# EAGLE board PCB_CAPA1 (EAGLE 9.5.1)
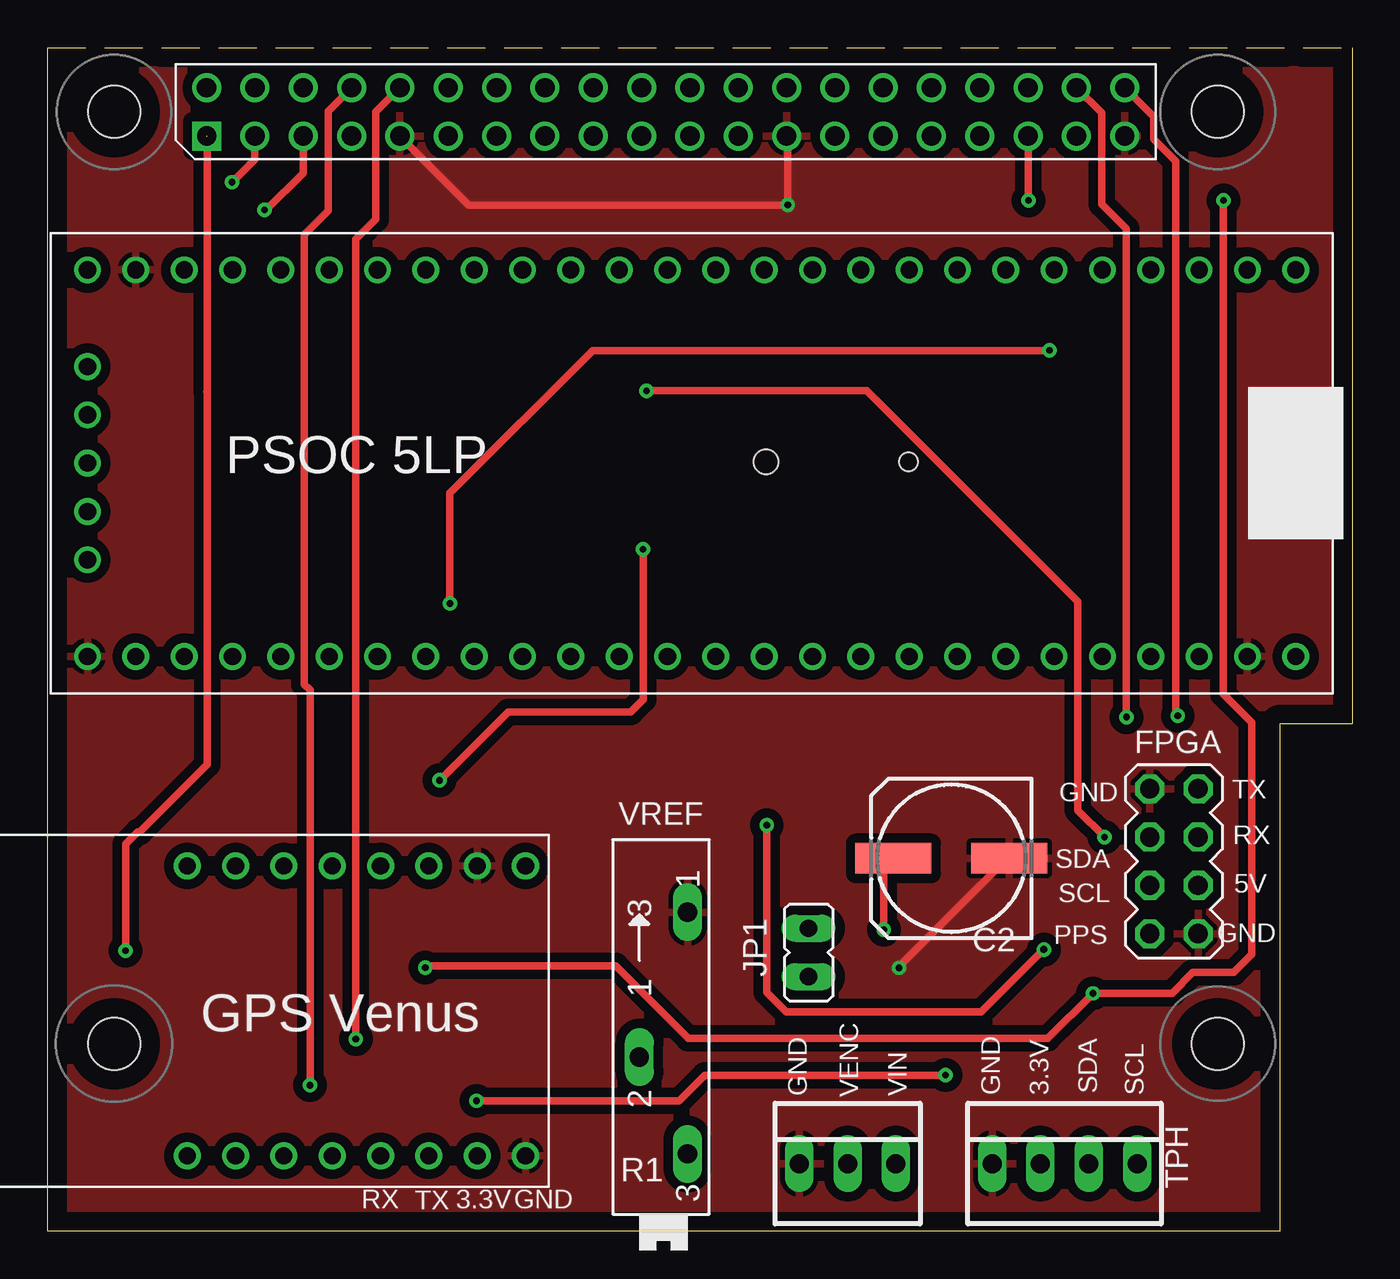
[diagram p0: board, top side]
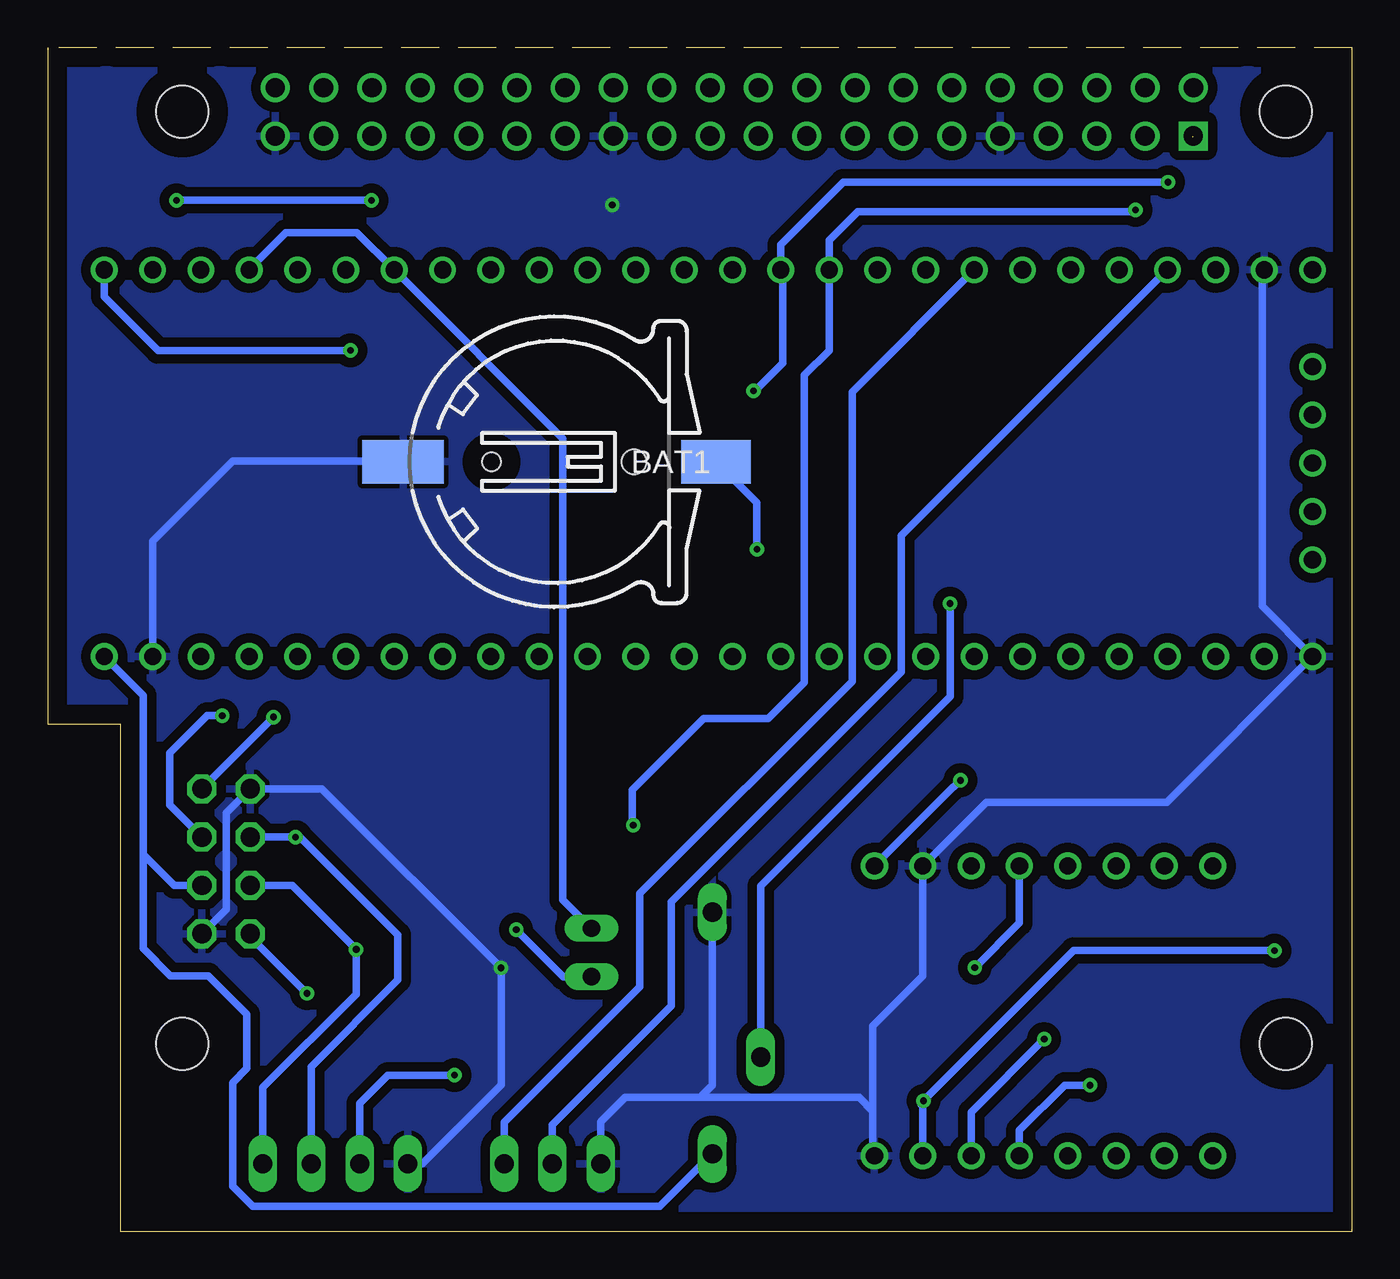
[diagram p1: board, bottom side, seen from below]

Size 68.58 x 62.23 mm. Coordinates in mm from the lower left corner, seen from the top.
Outline: 0,0 0,62.23 68.58,62.23 68.58,26.67 64.77,26.67 64.77,0 0,0
Copper layers (1*16): Top 0.035mm / dielectric 1.5mm / Bottom 0.035mm
Design rules "default": minimum track width 6mil, minimum drill 0.35mm, track to track 6mil, track to pad 6mil, pad to pad 6mil, via to via 6mil, smd to smd 6mil, copper to edge 40mil, drill to drill 6mil, minimum pad ring 10mil, minimum via ring 8mil, stop-mask expansion 4mil, vias tented up to drill 0mil, thermal gap 10mil

## Footprints (pad centres in the part's own frame; a part is rotated, then mirrored left to right if it is on the bottom)
CH291-1220LF = smd 2.3 x 3.66: + 0,-2.296 | smd 2.3 x 4.3: - 0,14.146 | hole 1.3: 0,2 | hole 1: 0,9.5
153CLV-0807 = smd 4 x 1.6: + 3.05,0; - -3.05,0
MA04-2 = drill 1.016 octagon: 1 -3.81,-1.27; 2 -3.81,1.27; 3 -1.27,-1.27; 4 -1.27,1.27; 5 1.27,-1.27; 6 1.27,1.27; 7 3.81,-1.27; 8 3.81,1.27
GPS_VENUS = drill 0.9 pad 1.422: 3.3V 0,-15.24; CLK 0,-5.08; CS 0,-7.62; GND 15.24,-15.24; GND1 0,-17.78; MISO 0,-2.54; MOSI 0,0; NAV 15.24,-12.7; PPS 15.24,-10.16; RX0 0,-10.16; RX1 15.24,-7.62; SCL 15.24,-2.54; SDA 15.24,0; TX0 0,-12.7; TX1 15.24,-5.08; VBAT 15.24,-17.78
JP1 = drill 0.914 long: 1 0,-1.27; 2 0,1.27
RPI3 = drill 1.016 square: P$1 8.37,51.23 | drill 1.016: P$2 8.357,53.772; P$3 10.897,51.232; P$4 10.897,53.772; P$5 13.437,51.232; P$6 13.437,53.772; P$7 15.977,51.232; P$8 15.977,53.772; P$9 18.517,51.232; P$10 18.517,53.772; P$11 21.057,51.232; P$12 21.057,53.772; P$13 23.597,51.232; P$14 23.597,53.772; P$15 26.137,51.232; P$16 26.137,53.772; P$17 28.677,51.232; P$18 28.677,53.772; P$19 31.217,51.232; P$20 31.217,53.772; P$21 33.757,51.232; P$22 33.757,53.772; P$23 36.297,51.232; P$24 36.297,53.772; P$25 38.837,51.232; P$26 38.837,53.772; P$27 41.377,51.232; P$28 41.377,53.772; P$29 43.917,51.232; P$30 43.917,53.772; P$31 46.457,51.232; P$32 46.457,53.772; P$33 48.997,51.232; P$34 48.997,53.772; P$35 51.537,51.232; P$36 51.537,53.772; P$37 54.077,51.232; P$38 54.077,53.772; P$39 56.617,51.232; P$40 56.617,53.772 | hole 2.75: 3.5,3.5; 61.5,3.5; 3.5,52.5; 61.5,52.5
SP19L = drill 1.016 long: A 5.715,-1.27; E -6.985,-1.27; S -1.905,1.27
PSOC_5LP = drill 0.9 pad 1.4: 0.0 0,-38.1; 0.1 0,-40.64; 0.2 0,-43.18; 0.3 0,-45.72; 0.4 0,-48.26; 0.5 0,-50.8; 0.6 0,-53.34; 0.7 0,-55.88; 1.0 20.32,-22.86; 1.1 20.32,-20.32; 1.2 20.32,-17.78; 1.3 20.32,-15.24; 1.4 20.32,-12.7; 1.5 20.32,-10.16; 1.6 20.32,-7.62; 1.7 20.32,-5.08; 2.0 20.32,-63.5; 2.1 20.32,-60.96; 2.2 20.32,-58.42; 2.3 20.32,-55.88; 2.4 20.32,-53.34; 2.5 20.32,-50.8; 2.6 20.32,-48.26; 2.7 20.32,-45.72; 3.0 0,-2.54; 3.1 0,-5.08; 3.2 0,-7.62; 3.3 0,-10.16; 3.4 0,-12.7; 3.5 0,-15.24; 3.6 0,-17.78; 3.7 0,-20.32; 12.2 20.32,-30.48; 12.3 20.32,-33.02; 12.4 20.32,-35.56; 12.5 20.32,-38.1; 12.6 20.32,-40.64; 12.7 20.32,-43.18; 15.0 0,-22.86; 15.1 0,-25.4; 15.2 0,-27.94; 15.3 0,-30.48; 15.4 0,-33.02; 15.5 0,-35.56; GND 0,0; GND2 0,-60.96; GND3 20.32,-2.54; GND4 7.62,0; RST 0,-58.42; RST2 10.16,0; SCL 20.32,-25.4; SDA 20.32,-27.94; SWDCLK 12.7,0; SWDI0 15.24,0; VDD 0,-63.5; VDD2 20.32,0; VTARG 5.08,0
22-23-2041 = drill 1 long: 1 -3.81,0; 2 -1.27,0; 3 1.27,0; 4 3.81,0
22-23-2031 = drill 1 long: 1 -2.54,0; 2 0,0; 3 2.54,0

## Placement (x,y rotation side)
BAT1  3V  [CH291-1220LF]  35.75,40.45 90 bottom
C2  [153CLV-0807]  47.5,19.6 180 top
FPGA  [MA04-2]  59.2,19.45 90 top
GPS  GPS_VENUS  [GPS_VENUS]  7.34,3.97 90 top
JP1  [JP1]  40,14.65 0 top
PCB1  RPI3RPI3  [RPI3]  0,6.35 0 top
R1  [SP19L]  32.37,11.05 90 top
U$1  PSOC_5LP  [PSOC_5LP]  2.1,30.22 90 top
X1  SENSOR TPH  [22-23-2041]  53.45,3.55 0 top
X2  EMILL  [22-23-2031]  42.05,3.55 0 top

## Library data of the parts
BAT1 = battery
C2 = rcl; SPICEPREFIX: C
FPGA = con-lstb_v2; OC_FARNELL: unknown; OC_NEWARK: unknown
GPS = GPS_VENUS
JP1 = jumper
PCB1 = RP3B
R1 = pot
U$1 = PSOC_5LP
X1 = con-molex; MF: MOLEX; MPN: 22-23-2041; OC_FARNELL: 1462920; OC_NEWARK: 38C0355
X2 = con-molex; MF: MOLEX; MPN: 22-23-2031; OC_FARNELL: 1462950; OC_NEWARK: 30C0862

## Nets
3.3V: GPS.3.3V PCB1.P$1 X1.2
5V: FPGA.3 R1.E U$1.VDD
GND: BAT1.- C2.- FPGA.1 FPGA.8 GPS.GND GPS.GND1 PCB1.P$9 PCB1.P$25 PCB1.P$39 R1.A U$1.GND U$1.GND2 U$1.GND3 X1.1 X2.1
N$1: BAT1.+ GPS.VBAT
N$2: C2.+ JP1.1
PPS: FPGA.2 GPS.PPS PCB1.P$35
RX2PI: FPGA.5 PCB1.P$40
RXPI: GPS.TX0 PCB1.P$10
SCL: FPGA.4 PCB1.P$5 U$1.SCL X1.4
SDA: FPGA.6 PCB1.P$3 U$1.SDA X1.3
TX2PI: FPGA.7 PCB1.P$38
TXPI: GPS.RX0 PCB1.P$8
VDC: JP1.2 U$1.2.3 U$1.2.6
VENC: U$1.1.6 X2.2
VIN: U$1.1.2 X2.3
VREF: R1.S U$1.2.0

## Tracks (layer width: path | path; a pad name or v marks a point on that pad's centre or on a via)
3.3V  (via drill 0.35)  (1 unrouted)
  Top 0.4: v22.55,6.85 33.2,6.85 34.55,8.2 v47.2,8.2 | 8.37,44.13 8.4,44.1 8.4,24.55 4.85,21 4.75,21 4.1,20.35 v4.1,14.75
  Top 0.406: 8.4,44.1 8.4,57.55
  Bottom 0.4: GPS.3.3V 22.58,6.58 22.65,6.65 22.65,6.75 v22.55,6.85 14.65,14.75 v4.1,14.75 | X1.2 52.18,6.72 50.7,8.2 v47.2,8.2
5V
  Bottom 0.4: FPGA.3 61.93,18.18 63.55,19.8 | 63.55,19.8 63.55,26.3 63.55,28.17 U$1.VDD | R1.E 36.41,1.3 57.8,1.3 58.85,2.35 58.85,7.8 58.1,8.55 58.1,11.4 60.12,13.43 62.12,13.43 63.55,14.85 63.55,19.8
GND  (via drill 0.35)
  Top 0.4: v38.9,53.95 38.84,54.01 | C2.- 50.2,19.35 44.74,13.89 v44.74,13.84
  Top 0.406: 38.9,57.52 v38.9,53.95 22.15,53.95 PCB1.P$9
  Bottom 0.4: X1.1 48.89,3.55 44.74,7.7 v44.74,13.84 54.16,23.26 FPGA.8 59.2,21.99 59.2,16.91 FPGA.1 | R1.A 33.64,7.66 34.27,7.03 | v38.9,53.95 38.95,53.9 | U$1.GND3 4.75,50.65 4.75,32.87 U$1.GND 9.77,22.55 19.24,22.55 GPS.GND 22.58,13.42 25.2,10.8 25.2,6.3 | 25.2,6.3 25.2,4.05 GPS.GND1 | 25.2,6.3 25.93,7.03 34.27,7.03 | 34.27,7.03 38.23,7.03 39.51,5.74 X2.1 | U$1.GND2 63.06,36.29 58.85,40.5 49.95,40.5 BAT1.-
  pour Top (isolate 0.5): 0.05,62.25 68.5,62.25 68.5,26.75 68.55,26.7 64.9,26.7 64.85,26.75 64.85,0 0,0 0,62.2
  pour Bottom (isolate 0.5): 0,62.25 68.5,62.25 68.55,62.2 68.55,26.65 64.8,26.65 64.8,-0.05 64.85,-0.1 0,-0.1
N$1  (via drill 0.35)
  Top 0.4: v20.6,23.7 24.2,27.3 30.65,27.3 31.3,27.95 v31.3,35.85
  Bottom 0.4: GPS.VBAT 20.98,23.35 20.95,23.35 v20.6,23.7 | v31.3,35.85 31.3,38.3 BAT1.+
N$2  (via drill 0.35)
  Top 0.4: v43.95,15.85 43.95,18.9 44.65,19.6 C2.+
  Bottom 0.4: JP1.1 41.48,13.38 v43.95,15.85
PPS  (via drill 0.35)
  Top 0.4: v19.85,13.85 19.95,13.95 29.85,13.95 33.67,10.12 52.58,10.12 v54.95,12.5 59.1,12.5 60.2,13.6 62.35,13.6 63.3,14.55 63.3,26.75 61.8,28.25 v61.8,54.2 | PCB1.P$35 51.55,57.57 v51.55,54.2
  Bottom 0.4: FPGA.2 57.93,15.48 v54.95,12.5 | v19.85,13.85 17.5,16.2 GPS.PPS | v61.8,54.2 v51.55,54.2
RX2PI  (via drill 0.35)
  Top 0.4: v59.4,27.1 59.35,27.05 59.3,27.1 59.3,56.25 58.15,57.4 58.15,58.59 PCB1.P$40
  Bottom 0.4: v59.4,27.1 60.2,27.1 62.15,25.15 62.15,22.4 FPGA.5
RXPI  (via drill 0.35)
  Top 0.4: 17.25,58.85 17.25,53.2 16.2,52.15 v16.2,10.1
  Top 0.406: 17.25,58.85 PCB1.P$10
  Bottom 0.4: v16.2,10.1 20.04,6.26 GPS.TX0
SCL  (via drill 0.35)
  Top 0.4: v11.4,53.7 11.5,53.7 13.44,55.64 | v37.8,21.35 37.8,12.55 38.83,11.53 49.08,11.53 v52.36,14.81 52.4,14.85
  Top 0.406: 13.44,55.64 PCB1.P$5
  Bottom 0.4: X1.4 57.26,7.56 52.36,12.46 v52.36,14.81 55.73,18.18 FPGA.4 | v11.4,53.7 11.5,53.6 26,53.6 27.5,52.1 U$1.SCL 27.5,46.3 28.8,45 28.8,28.85 30.7,26.95 34.1,26.95 37.85,23.2 37.85,21.4 v37.8,21.35
SDA  (via drill 0.35)
  Top 0.4: v9.7,55.15 10.9,56.35 | v55.55,20.72 54.15,22.12 54.15,33.1 43.05,44.2 31.45,44.2 v31.48,44.17
  Top 0.406: 10.9,56.35 PCB1.P$3
  Bottom 0.4: X1.3 54.72,8.65 50.17,13.2 50.17,15.57 55.32,20.72 v55.55,20.72 FPGA.6 | v9.7,55.15 26.75,55.15 30.04,51.86 U$1.SDA 29.95,50.45 29.95,45.65 31.45,44.15 v31.48,44.17
TX2PI  (via drill 0.35)
  Top 0.4: 55.4,58.8 55.4,54 56.7,52.7 v56.7,27.03
  Top 0.406: 55.4,58.8 PCB1.P$38
  Bottom 0.4: v56.7,27.03 FPGA.7
TXPI  (via drill 0.35)
  Top 0.4: 14.75,58.9 14.75,53.65 13.5,52.4 13.5,28.75 13.8,28.45 v13.8,7.67
  Top 0.406: 14.75,58.9 PCB1.P$8
  Bottom 0.4: v13.8,7.67 15.13,7.67 17.5,5.3 GPS.RX0
VDC
  Bottom 0.4: JP1.2 41.5,17.42 41.5,41.68 U$1.2.6 52.32,52.5 56.05,52.5 57.99,50.55 U$1.2.3
VENC
  Bottom 0.4: U$1.1.6 23.7,36.56 23.7,29.4 35.8,17.3 35.8,11.85 42.05,5.6 X2.2
VIN
  Bottom 0.4: U$1.1.2 26.3,44.12 26.3,28.9 37.45,17.75 37.45,12.85 44.59,5.71 X2.3
VREF  (via drill 0.35)
  Top 0.4: v52.65,46.3 28.65,46.3 21.15,38.8 v21.15,33
  Bottom 0.4: R1.S 31.1,18.15 21.15,28.1 v21.15,33 | v52.65,46.3 62.76,46.3 65.6,49.14 U$1.2.0

## Text on the board
tPlace: PSOC 5LP | TX | GND | VREF | SDA | RX | SCL | 5V | PPS | GND | GPS Venus | GND | VENC | VIN | GND | 3.3V | SDA | SCL | TPH | RX | TX | 3.3V | GND